# EAGLE board SPEEEDuino_v1_0 (EAGLE 8.1.0)
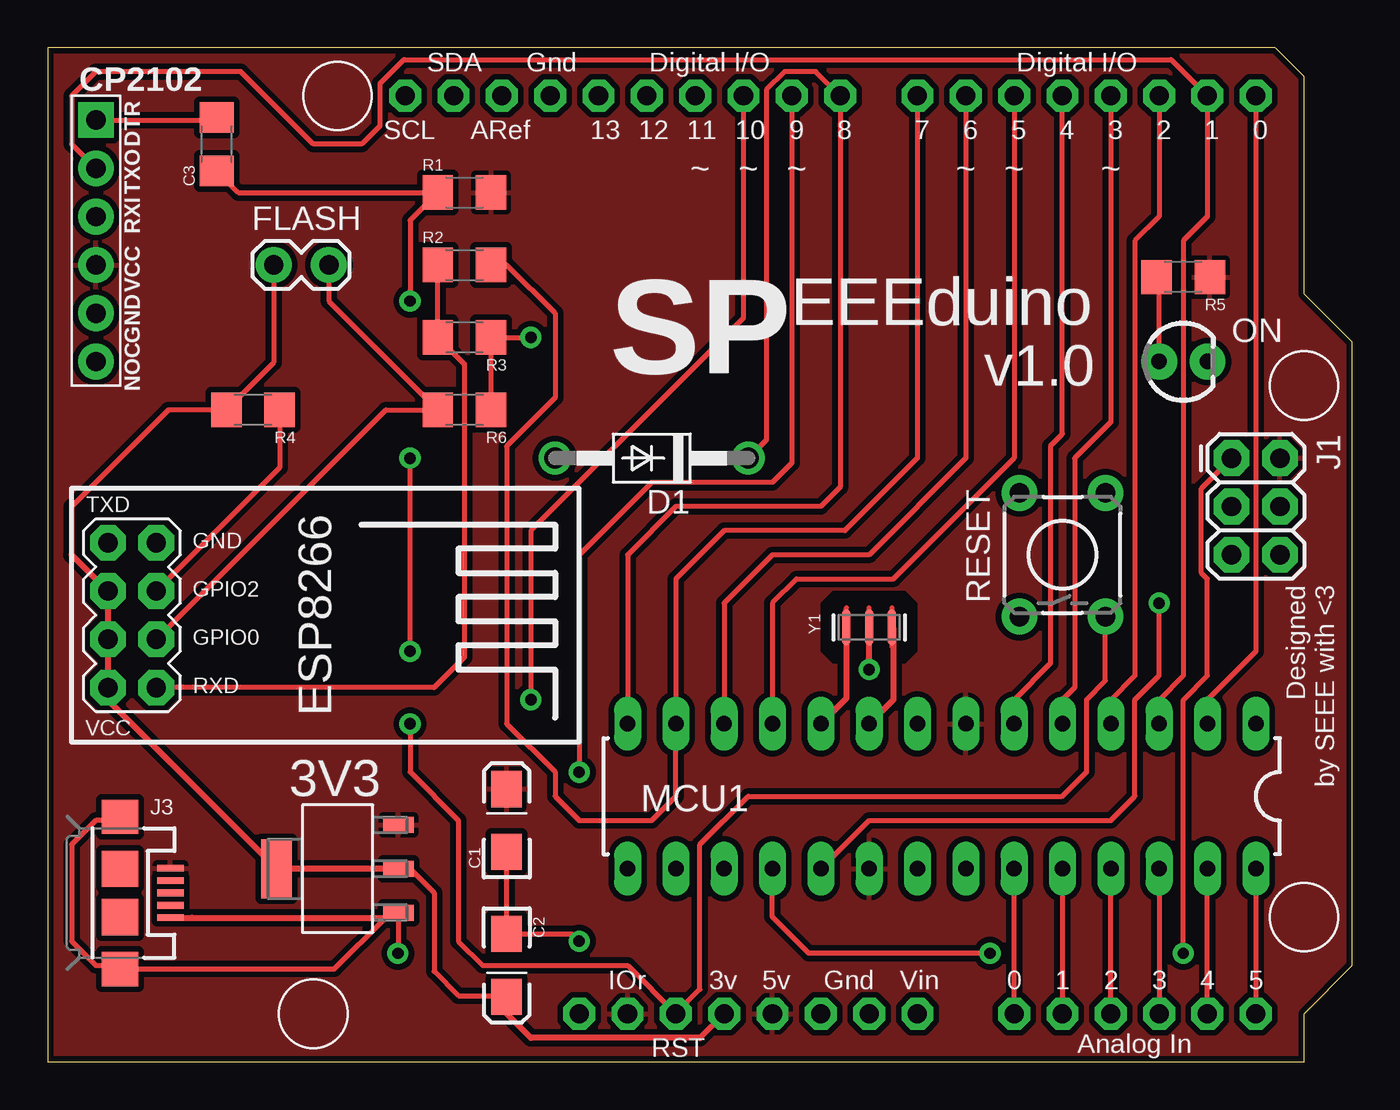
[diagram p0: board, top side]
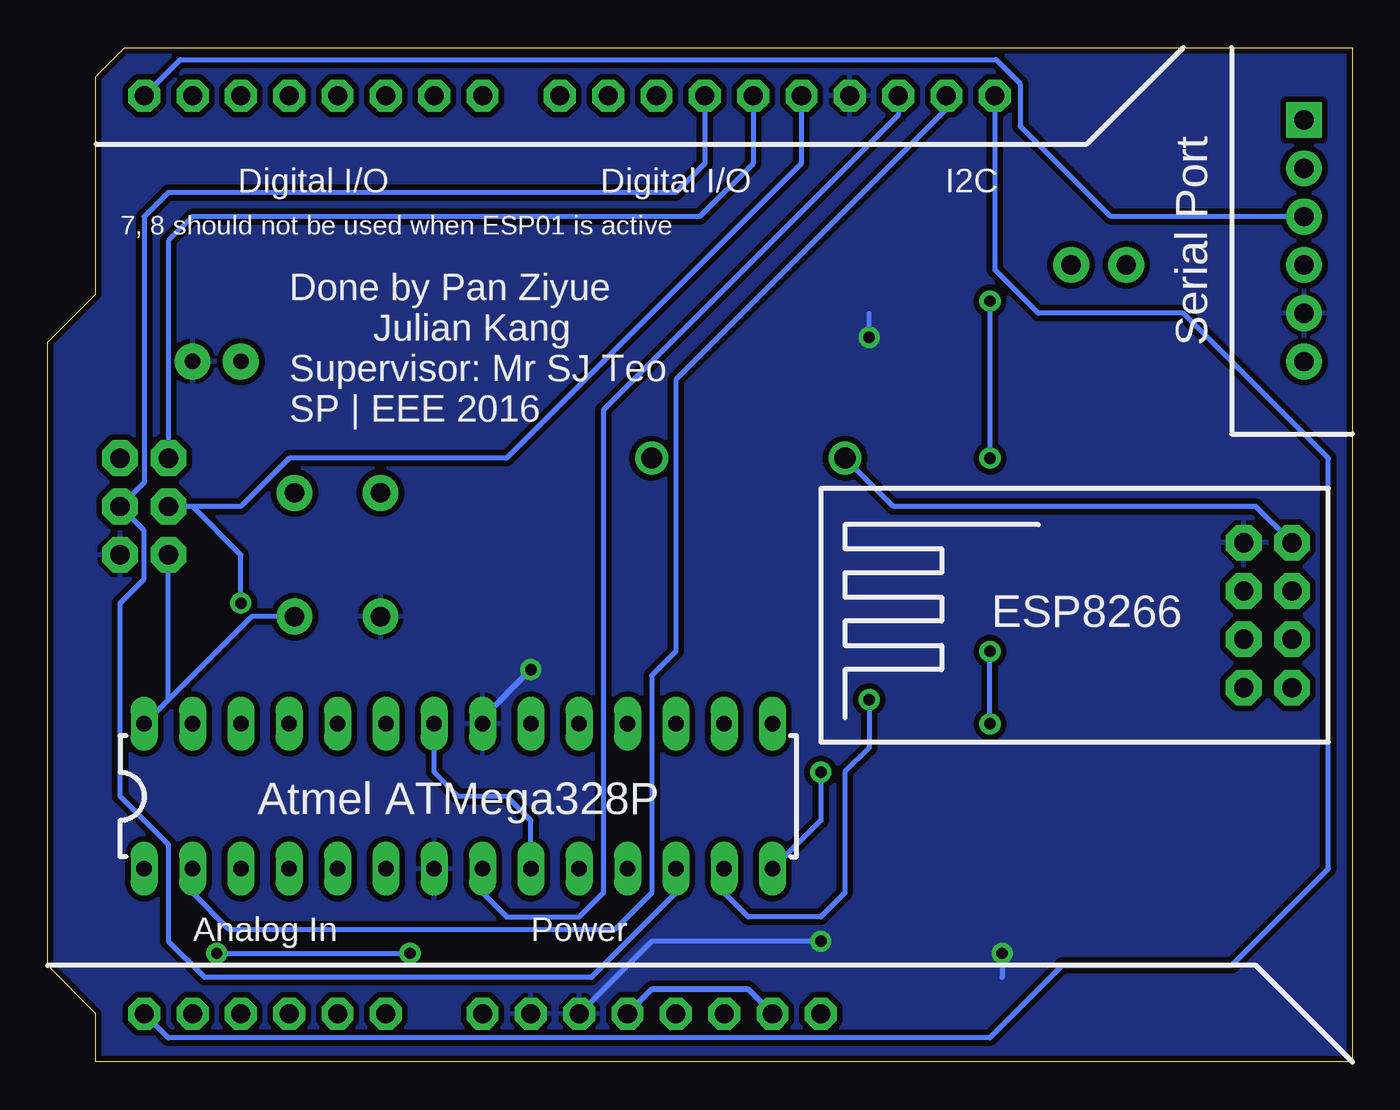
[diagram p1: board, bottom side, seen from below]

Size 68.58 x 53.34 mm. Coordinates in mm from the lower left corner, seen from the top.
Copper layers (1*16): Top 0.035mm / dielectric 1.5mm / Bottom 0.035mm
Design rules "SparkFun": minimum track width 8mil, minimum drill 20mil, track to track 8mil, track to pad 8mil, pad to pad 8mil, via to via 8mil, smd to smd 8mil, copper to edge 10mil, drill to drill 8mil, minimum pad ring 12mil, minimum via ring 10mil, stop-mask expansion 4mil, vias tented up to drill 25mil, thermal gap 10mil

## Footprints (pad centres in the part's own frame; a part is rotated, then mirrored left to right if it is on the bottom)
EIA3216-KIT = smd 1.9 x 1.6: A 1.65,0; C -1.65,0
1206 = smd 1.6 x 1.8: 1 -1.4,0; 2 1.4,0
DO41-10 = drill 1.118: A 5.08,0; C -5.08,0
2X4 = drill 1.016 pad 1.88 octagon: 1 -3.81,-1.27; 2 -3.81,1.27; 3 -1.27,-1.27; 4 -1.27,1.27; 5 1.27,-1.27; 6 1.27,1.27; 7 3.81,-1.27; 8 3.81,1.27
1X02_LOCK = drill 1.016 pad 1.88: 1 -0.178,0; 2 2.718,0
2X3 = drill 1.016 pad 1.88 octagon: 1 0,0; 2 0,2.54; 3 2.54,0; 4 2.54,2.54; 5 5.08,0; 6 5.08,2.54
CP2102_DEVICE_SIDE = drill 1.016 pad 1.88 square: P$1 -6.35,0 | drill 1.016 pad 1.88: P$2 -3.81,0; P$3 -1.27,0; P$4 1.27,0; P$5 3.81,0; P$6 6.35,0
USB-MICROB = smd 0.35 x 1.4: D+ 0,2.65; D- -0.65,2.65; GND 1.3,2.65; ID 0.65,2.65; VBUS -1.3,2.65 | smd 1.8 x 1.9: MT1 -4,0; MT2 4,0 | smd 1.9 x 1.9: P$1 -1.27,0; P$2 1.27,0
DIL28-3 = drill 0.813 long: 1 -16.51,-3.81; 2 -13.97,-3.81; 3 -11.43,-3.81; 4 -8.89,-3.81; 5 -6.35,-3.81; 6 -3.81,-3.81; 7 -1.27,-3.81; 8 1.27,-3.81; 9 3.81,-3.81; 10 6.35,-3.81; 11 8.89,-3.81; 12 11.43,-3.81; 13 13.97,-3.81; 14 16.51,-3.81; 15 16.51,3.81; 16 13.97,3.81; 17 11.43,3.81; 18 8.89,3.81; 19 6.35,3.81; 20 3.81,3.81; 21 1.27,3.81; 22 -1.27,3.81; 23 -3.81,3.81; 24 -6.35,3.81; 25 -8.89,3.81; 26 -11.43,3.81; 27 -13.97,3.81; 28 -16.51,3.81
LED3MM = drill 0.813 pad 1.88: A -1.27,0; K 1.27,0
TACTILE-PTH = drill 1.016 pad 1.88: 1 -3.251,2.261; 2 3.251,2.261; 3 -3.251,-2.261; 4 3.251,-2.261
SOT230P696X180-4N = smd 1.6 x 0.838: 1 -3.2,2.311; 2 -3.2,0; 3 -3.2,-2.311 | smd 1.6 x 3.099: 4 3.2,0
ARDUINOR3 = drill 1 pad 1.676 octagon: 3V 35.56,2.54; 5V 38.1,2.54; A0 50.8,2.54; A1 53.34,2.54; A2 55.88,2.54; A3 58.42,2.54; A4 60.96,2.54; A5 63.5,2.54; AREF 23.876,50.8; D0 63.5,50.8; D1 60.96,50.8; D2 58.42,50.8; D3 55.88,50.8; D4 53.34,50.8; D5 50.8,50.8; D6 48.26,50.8; D7 45.72,50.8; D8 41.656,50.8; D9 39.116,50.8; D10 36.576,50.8; D11 34.036,50.8; D12 31.496,50.8; D13 28.956,50.8; GND 26.416,50.8; GND1 43.18,2.54; GND2 40.64,2.54; IOREF 30.48,2.54; RESERVED 27.94,2.54; RESET 33.02,2.54; SCL 18.796,50.8; SDA 21.336,50.8; VIN 45.72,2.54
RESONATOR-SMD = smd 0.45 x 1.905: 1 -1.2,0; 2 0,0; 3 1.2,0

## Placement (x,y rotation side)
C1  10uF  [EIA3216-KIT]  24.13,12.7 90 top
C2  10uF  [EIA3216-KIT]  24.13,5.08 270 top
C3  0.1uF  [1206]  8.89,48.26 90 top
D1  1N5817  [DO41-10]  31.75,31.75 180 top
ESP8266  [2X4]  4.45,23.5 90 top
FLASH  [1X02_LOCK]  14.61,41.91 180 top
J1  ISP/SPI  [2X3]  62.23,31.75 270 top
J2  DATA  [CP2102_DEVICE_SIDE]  2.54,43.18 270 top
J3  POWER ONLY  [USB-MICROB]  3.81,8.89 270 top
MCU1  Atmel ATMega328P  [DIL28-3]  46.99,13.97 180 top
ON  [LED3MM]  59.69,36.83 0 top
R1  10k  [1206]  21.91,45.72 0 top
R2  10k  [1206]  21.91,41.91 0 top
R3  20k  [1206]  21.91,38.1 180 top
R4  10k  [1206]  10.79,34.29 180 top
R5  330  [1206]  59.69,41.27 180 top
R6  10k  [1206]  21.91,34.29 180 top
RESET  SWITCH-MOMENTARY-2PTH  [TACTILE-PTH]  53.34,26.67 90 top
U1  3V3REG  [SOT230P696X180-4N]  15.24,10.16 180 top
U2  ARDUINOR3-DIMENSION  [ARDUINOR3]  0,0 0 top
Y1  16MHZ  [RESONATOR-SMD]  43.18,22.86 180 top

## Library data of the parts
C1-C3 = SparkFun-Capacitors
D1 = diode
ESP8266 FLASH J1 J2 = SparkFun-Connectors
J3 = SparkFun-Connectors; PROD_ID: CONN-09505
MCU1 = SparkFun-DigitalIC
ON = SparkFun-LED; PROD_ID: DIO-08794
R1-R6 = SparkFun-Resistors
RESET = SparkFun-Electromechanical; PROD_ID: SWCH-08441
U1 = custom; MPN: LM1117MP-3.3; OC_FARNELL: 9778195; OC_NEWARK: 41K3470; PACKAGE: SOT223-3; SUPPLIER: NationalSemiconductor
U2 = adafruit
Y1 = SparkFun-FreqCtrl; PROD_ID: XTAL-08900

## Nets
3V: C2.A ESP8266.2 ESP8266.4 ESP8266.6 FLASH.2 R4.2 U1.2 U1.4 U2.3V
A0: MCU1.23 U2.A0
A1: MCU1.24 U2.A1
A2: MCU1.25 U2.A2
A3: MCU1.26 U2.A3
A4: MCU1.27 U2.A4 U2.SDA
A5: MCU1.28 U2.A5 U2.SCL
AREF: MCU1.21 U2.AREF
D0: J2.P$3 MCU1.2 U2.D0
D1: J2.P$2 MCU1.3 U2.D1
D2: MCU1.4 U2.D2
D3: MCU1.5 U2.D3
D4: MCU1.6 U2.D4
D5: MCU1.11 U2.D5
D6: MCU1.12 U2.D6
D7: MCU1.13 R2.2 U2.D7
D8: D1.C MCU1.14 U2.D8
D9: MCU1.15 U2.D9
D10: MCU1.16 U2.D10
D11: J1.4 MCU1.17 U2.D11
D12: J1.1 MCU1.18 U2.D12
D13: J1.3 MCU1.19 U2.D13
GND: C1.C C2.C ESP8266.7 J1.6 J2.P$5 J3.GND J3.MT1 J3.MT2 MCU1.8 MCU1.22 ON.K R3.1 R6.1 RESET.1 U1.1 U2.GND U2.GND1 U2.GND2 Y1.2
N$1: MCU1.10 Y1.3
N$2: ESP8266.1 R2.1 R3.2
N$3: ESP8266.5 R4.1
N$4: ON.A R5.2
N$5: MCU1.9 Y1.1
N$6: C3.2 J2.P$1
N$7: D1.A ESP8266.8
N$8: ESP8266.3 FLASH.1 R6.2
RESET: C3.1 J1.5 MCU1.1 R1.1 RESET.3 U2.RESET
VCC: C1.A J1.2 J2.P$4 J3.VBUS MCU1.7 MCU1.20 R1.2 R5.1 U1.3 U2.5V U2.IOREF
VIN: U2.VIN

## Tracks (layer width: path | path; a pad name or v marks a point on that pad's centre or on a via)
3V
  Top 0.254: FLASH.2 11.89,36.78 R4.2 6.35,34.29 1.27,29.21 1.27,26.67 | U1.2 19.05,10.16 20.32,8.89 20.32,4.76 21.59,3.49 24.07,3.49 C2.A
  Top 0.305: U2.3V 34.29,1.27 25.4,1.27 24.13,2.54 C2.A | U1.2 U1.4 | U1.4 12.04,11.46 | 1.27,26.67 ESP8266.6 ESP8266.4 ESP8266.2 3.17,19.02 U1.4
A0
  Top 0.254: U2.A0 MCU1.23
A1
  Top 0.254: MCU1.24 U2.A1
A2
  Top 0.254: U2.A2 MCU1.25
A3
  Top 0.254: MCU1.26 U2.A3
A4
  Top 0.254: U2.A4 MCU1.27
  Bottom 0.254: MCU1.27 60.96,8.89 59.05,6.99 38.73,6.99 36.83,8.89 36.83,20.32 35.56,21.59 35.56,35.88 21.34,50.1 U2.SDA
A5
  Top 0.254: MCU1.28 U2.A5
  Bottom 0.254: U2.A5 62.23,1.27 19.05,1.27 15.24,5.08 6.35,5.08 1.27,10.16 1.27,31.75 8.89,39.37 16.51,39.37 18.8,41.66 U2.SCL
AREF
  Bottom 0.254: U2.AREF 23.88,49.78 39.37,34.29 39.37,8.89 40.64,7.62 44.45,7.62 45.72,8.89 MCU1.21
D0
  Top 0.254: U2.D0 63.5,21.59 60.96,19.05 MCU1.2
  Bottom 0.254: U2.D0 61.59,52.7 18.73,52.7 17.46,51.44 17.46,49.21 12.7,44.45 J2.P$3
D1
  Top 0.254: J2.P$2 1.27,48.26 1.27,50.8 2.54,52.07 10.16,52.07 13.97,48.26 16.51,48.26 17.46,49.21 17.46,51.44 18.73,52.7 59.05,52.7 U2.D1 60.96,44.45 59.69,43.18 59.69,20.32 58.42,19.05 MCU1.3
D2
  Top 0.254: U2.D2 58.42,44.45 57.15,43.18 57.15,20.32 55.88,19.05 MCU1.4
D3
  Top 0.254: U2.D3 55.88,33.66 53.98,31.75 53.98,19.68 53.34,19.05 MCU1.5
D4
  Top 0.254: MCU1.6 50.8,19.05 52.7,20.95 52.7,32.38 53.34,33.02 U2.D4
D5
  Top 0.254: U2.D5 50.8,31.75 44.45,25.4 39.37,25.4 38.1,24.13 MCU1.11
D6
  Top 0.254: MCU1.12 35.56,24.13 38.1,26.67 43.18,26.67 48.26,31.75 U2.D6
D7
  Top 0.254: R2.2 24.13,41.91 26.67,39.37 26.67,34.92 24.13,32.38 24.13,17.78 26.67,15.24 26.67,13.97 27.94,12.7 31.75,12.7 33.02,13.97 MCU1.13 33.02,25.4 35.56,27.94 41.91,27.94 45.72,31.75 U2.D7
D8
  Top 0.254: MCU1.14 30.48,26.67 33.02,29.21 40.64,29.21 41.66,30.23 U2.D8 40.39,52.07 38.73,52.07 37.78,51.12 37.78,32.7 D1.C
D9  (via drill 0.6)
  Top 0.254: U2.D9 39.12,31.5 38.1,30.48 31.75,30.48 27.94,26.67 v27.94,15.24
  Bottom 0.254: v27.94,15.24 27.94,12.7 MCU1.15
D10  (via drill 0.6)
  Top 0.254: v25.4,19.05 25.4,27.94 36.58,39.12 U2.D10
  Bottom 0.254: v25.4,19.05 25.4,16.51 26.67,15.24 26.67,8.89 27.94,7.62 31.75,7.62 33.02,8.89 MCU1.16
D11
  Bottom 0.254: MCU1.17 35.56,8.89 40.01,4.45 60.33,4.45 62.23,6.35 62.23,11.43 64.77,13.97 64.77,24.13 63.5,25.4 63.5,27.94 J1.4 63.5,30.48 63.5,44.45 62.23,45.72 35.56,45.72 34.04,47.24 U2.D11
D12  (via drill 0.6)
  Top 0.254: J1.1 60.64,30.16 60.64,25.72 60.96,25.4 60.96,20.32 59.69,19.05 v59.69,5.71 | MCU1.18 38.1,7.62 40.01,5.71 v49.53,5.71
  Bottom 0.254: J1.1 62.23,43.18 60.96,44.45 34.29,44.45 31.5,47.24 U2.D12 | v59.69,5.71 v49.53,5.71
D13  (via drill 0.6)
  Top 0.254: MCU1.19 43.18,12.7 55.88,12.7 57.15,13.97 57.15,19.05 58.42,20.32 v58.42,24.13
  Bottom 0.254: 60.96,29.21 58.42,29.21 55.88,31.75 44.45,31.75 28.96,47.24 U2.D13 | 60.96,29.21 J1.3 | v58.42,24.13 58.42,26.67 60.96,29.21
GND  (via drill 0.6)
  Top 0.254: R6.1 R3.1 v25.4,38.1 | U1.1 18.44,5.74 v18.41,5.71 | v27.94,6.35 27.56,6.73 C2.C C1.C | 17.78,7.59 15.08,4.89 J3.MT2 3.62,5.08 2.54,5.08 1.27,6.35 1.27,11.43 2.54,12.7 4,12.7
  Top 0.305: U1.1 18.18,7.59 17.78,7.59 J3.GND 7.59,7.59 | 4,12.7 J3.MT1 | v43.18,20.64 Y1.2
  Bottom 0.254: v25.4,38.1 25.4,39.37 | v18.41,5.71 18.41,4.45 | v27.94,6.35 36.83,6.35 U2.GND2
  Bottom 0.305: MCU1.8 45.72,18.1 v43.18,20.64
  pour Bottom (isolate 0.305): 0,0 0,53.34 64.77,53.34 66.04,52.07 66.04,40.64 68.58,38.1 68.58,5.08 66.04,2.54 66.04,0
N$1
  Top 0.305: Y1.3 41.98,19.12 MCU1.10
N$2
  Top 0.254: R2.1 R3.2 21.91,36.7 21.91,21.27 20.32,19.68 ESP8266.1
N$3
  Top 0.254: R4.1 12.2,31.25 ESP8266.5
N$4
  Top 0.254: ON.A 58.42,41.15 R5.2
N$5
  Top 0.305: Y1.1 44.45,22.79 44.45,19.05 MCU1.9
N$6
  Top 0.254: J2.P$1 8.76,49.53 C3.2
N$7
  Bottom 0.254: ESP8266.8 5.08,29.21 24.13,29.21 D1.A
N$8
  Top 0.254: FLASH.1 14.78,40.02 R6.2 17.78,34.29 ESP8266.3
N$9
  cutout Top: 40.64,24.13 41.27,24.77 45.09,24.77 45.72,24.13 45.72,21.59 45.09,20.95 41.27,20.95 40.64,21.59
RESET  (via drill 0.6)
  Top 0.254: RESET.3 55.6,20.04 54.61,19.05 54.61,15.24 53.34,13.97 36.83,13.97 34.29,11.43 34.29,3.81 U2.RESET 30.48,5.08 22.86,5.08 21.59,6.35 21.59,12.7 19.05,15.24 v19.05,17.78 | R1.1 19.05,44.26 v19.05,40.01 | 19.24,44.45 R1.1 | R1.1 10.03,45.72 C3.1 | v19.05,21.59 v19.05,31.75
  Bottom 0.254: J1.5 62.23,19.05 MCU1.1 57.86,23.42 RESET.3 | v19.05,40.01 v19.05,31.75 | v19.05,17.78 v19.05,21.59
VCC
  Bottom 0.254: MCU1.20 43.18,12.7 44.45,13.97 46.99,13.97 48.26,15.24 MCU1.7
  Bottom 0.305: U2.IOREF 31.75,3.81 36.83,3.81 U2.5V
  pour Top (isolate 0.305): 0,0 0,53.34 64.77,53.34 66.04,52.07 66.04,40.64 68.58,38.1 68.58,5.08 66.04,2.54 66.04,0

## Text on the board
tPlace: ~ | ~ | ~ | ~ | ~ | ~ | EEEduino | SP | v1.0 | TXD | GND | Designed / by SEEE with <3 | GPIO2 | GPIO0 | RXD | VCC | 3V3
bPlace: I2C | Digital I/O | Digital I/O | Serial Port | 7, 8 should not be used when ESP01 is active | Done by Pan Ziyue / Julian Kang / Supervisor: Mr SJ Teo / SP | EEE 2016 | ESP8266 | Atmel ATMega328P | Power | Analog In